# Altium PCB MCP73831_BMS.PcbDoc
Units mm, origin at the board's own origin, x right, y up, seen from the top; angles counter-clockwise.
Board outline 30 x 20 mm, 2 copper layers (Top Layer, Bottom Layer), stack 1.271 mm thick; 25 components, 11 nets, 77 pads, 10 vias.
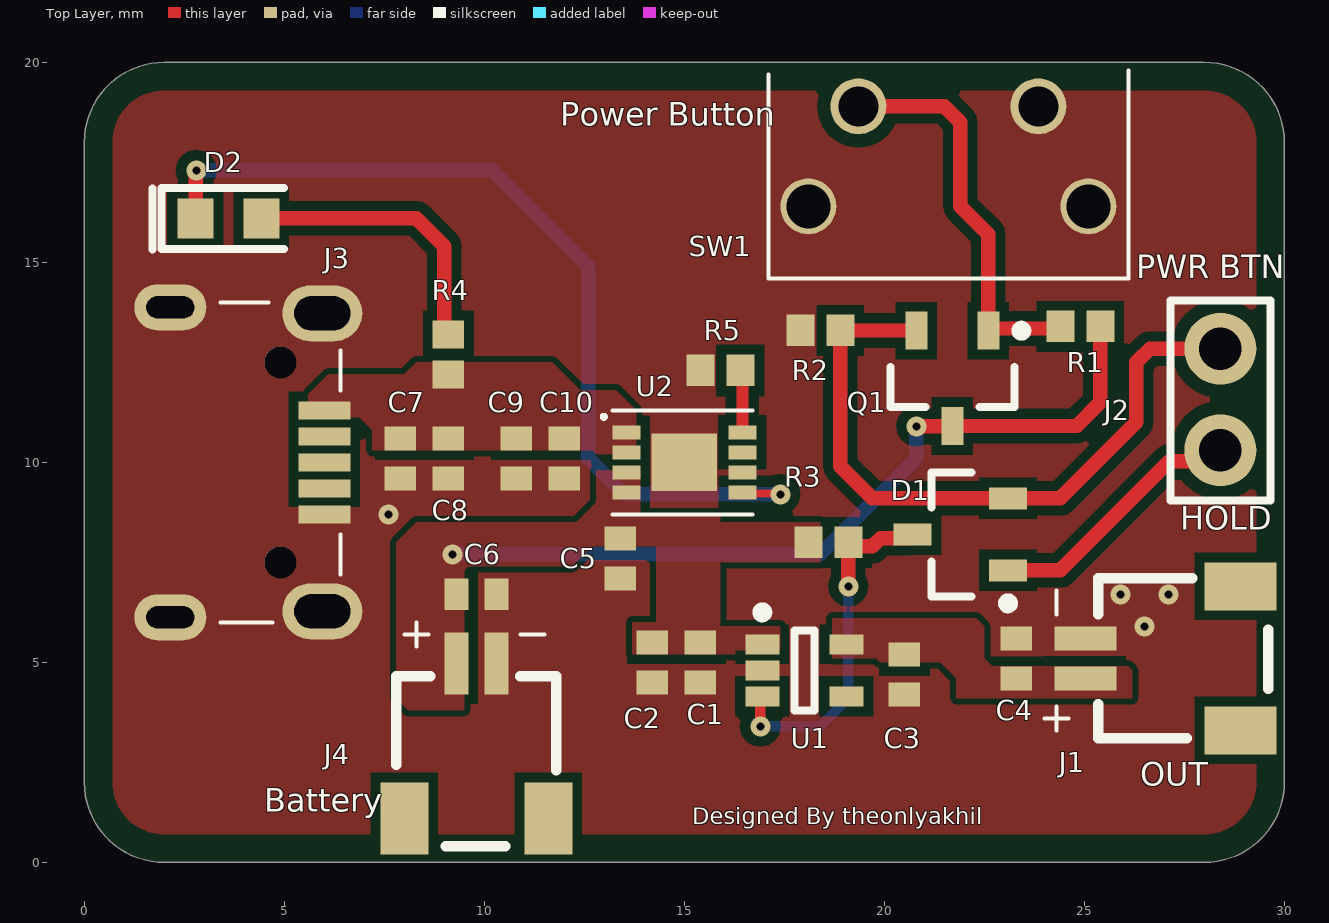
[diagram p0: Top Layer view]
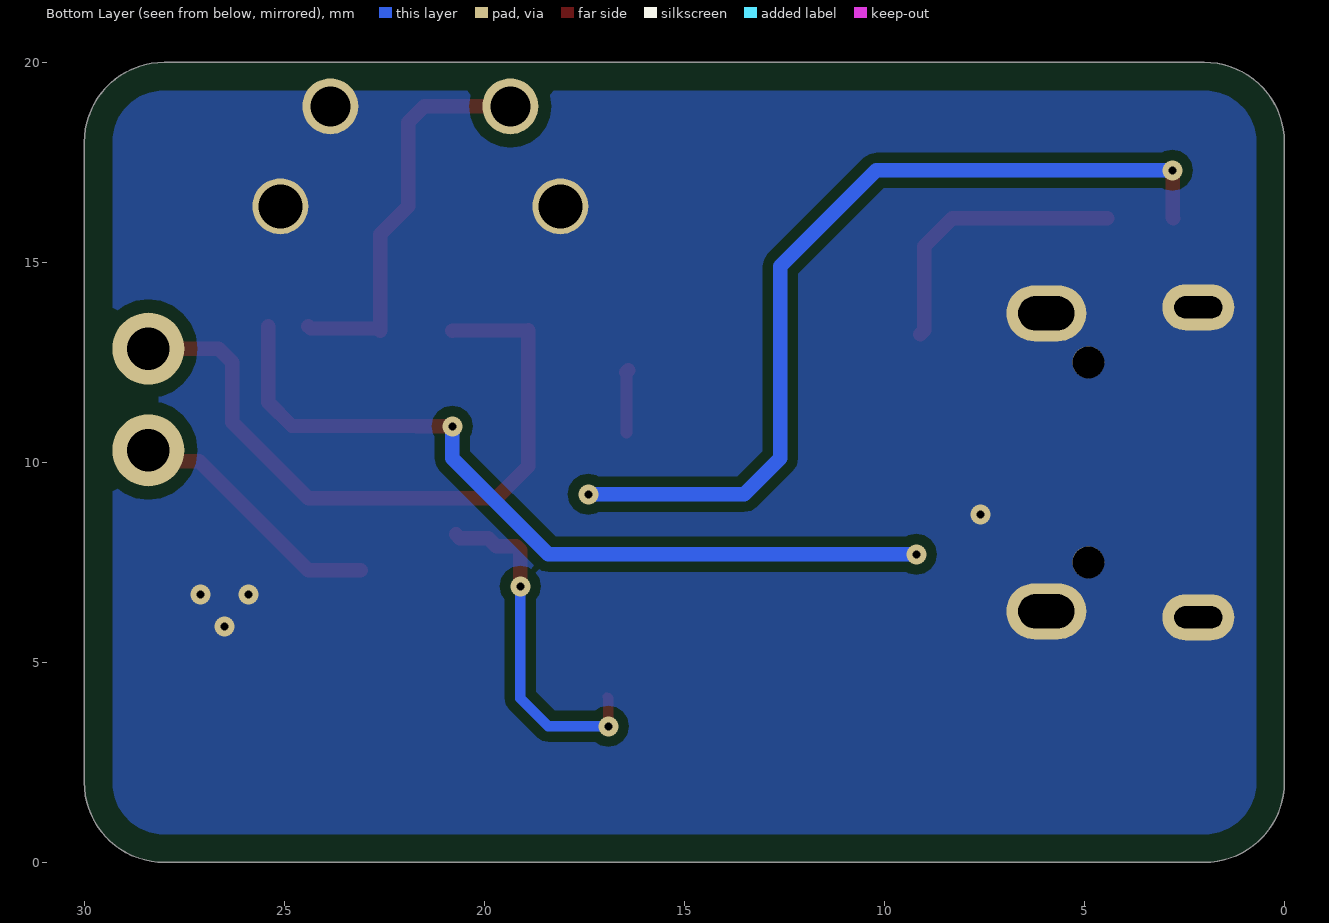
[diagram p1: Bottom Layer view, seen from below]
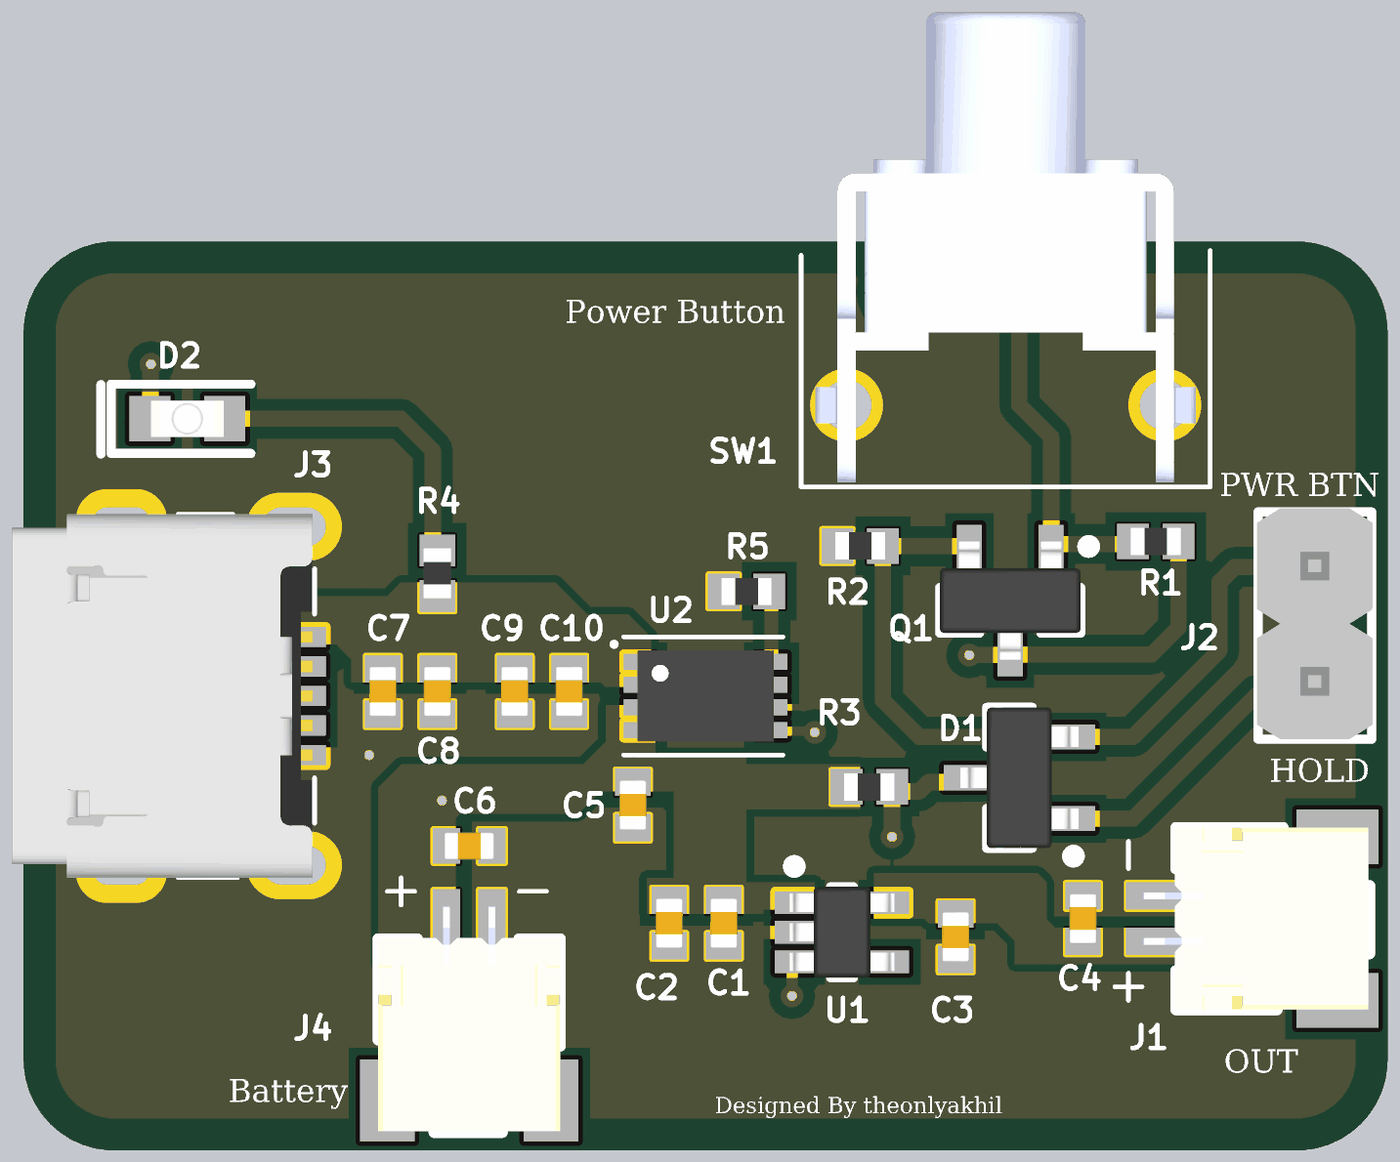
[diagram p2: 3D render of the assembled board from above, using the file's embedded part models]

## Layer stack, top to bottom
Top Solder: solder mask 0.0102, Solder Resist, Dk 3.5
Top Layer: signal copper 0.0356
Dielectric 1: dielectric 1.2, FR-4, Dk 4.8
Bottom Layer: signal copper 0.0356
Bottom Solder: solder mask 0.0102, Solder Resist, Dk 3.5

## Board outline
2,0 cw(c2,2) 0,2 0,18 cw(c2,18) 2,20 28,20 cw(c28,18) 30,18 30,2 cw(c28,2) 28,0

## Design rules (kind name [scope] priority, off if disabled: settings)
BoardOutlineClearance PAD_Clearance [InComponent('SW1')] p1: gap=0.1 ignorepadtopadclearanceinfootprint=FALSE
BoardOutlineClearance Mounting_Hole_Clearance_1 [InComponentClass('Mounting Hole')] p2: gap=0.2 ignorepadtopadclearanceinfootprint=FALSE
BoardOutlineClearance Top_Overlay_Clearance [OnLayer('Top Overlay')] p3: gap=0.2 ignorepadtopadclearanceinfootprint=FALSE
BoardOutlineClearance [All] p4: gap=0.7 ignorepadtopadclearanceinfootprint=FALSE except(0.2: SMDPad-OutlineEdge)
Clearance Fid_C [InComponentClass('FIDUCIALS') vs InPolygon] p1: gap=0.5 ignorepadtopadclearanceinfootprint=TRUE
Clearance Top_GND_Poly_Clearance [InNamedPolygon('TopGND')] p2: gap=0.3 ignorepadtopadclearanceinfootprint=FALSE
Clearance [All] p3: gap=0.254 ignorepadtopadclearanceinfootprint=TRUE except(0.102: Arc-Via Track-Via; 0.127: SMDPad-SMDPad; 0.15: Arc-Arc Arc-Track Arc-Text Track-Track Track-Text SMDPad-Text THPad-Text Via-Text Fill-Text Poly-Text Region-Text Text-Text Text-Hole; 0.152: Fill-Fill Fill-Poly Fill-Region Poly-Poly Poly-Region Region-Region; 0.16: Arc-SMDPad Track-SMDPad; 0.2: SMDPad-THPad; 0.279: Via-Via; 0.33: Arc-THPad Arc-Hole Track-THPad Track-Hole THPad-Fill THPad-Poly THPad-Region Fill-Hole Poly-Hole Region-Hole; 0.5: THPad-THPad THPad-Via THPad-Hole Via-Hole)
DiffPairsRouting ANAI_OUT [InDifferentialPair('GNSS_FE_ANAI')] p1: maxlimit=0.15 minlimit=0.15 mostfreqgap=0.15 toplayer_minwidth=0.194 toplayer_maxwidth=0.194 toplayer_prefwidth=0.194 bottomlayer_minwidth=0.194 bottomlayer_maxwidth=0.194 bottomlayer_prefwidth=0.194 maxuncoupledlength=12.7
HoleSize [All] p1: absolutevalues=TRUE maxlimit=6.3 minlimit=0.2 maxpercent=80.000 minpercent=20.000
HoleToHoleClearance Via_To_Via_Clearance [IsVia vs IsVia] p1: gap=0.254 allowstackedmicrovias=TRUE
HoleToHoleClearance [All] p2: gap=0.406 allowstackedmicrovias=TRUE
MatchedLengths "Mateched Lengths" [InNetClass('IQ_DATA')] p1: tolerance=1 checknetsindiffpair=FALSE checkdiffpairvsdiffpair=TRUE checkxsignals=TRUE checkothers=TRUE
MatchedLengths ANAI [InNetClass('ANAI_OUT')] p2: tolerance=0.5 checknetsindiffpair=FALSE checkdiffpairvsdiffpair=TRUE checkxsignals=TRUE checkothers=TRUE
MinimumAnnularRing [All] p1: minimumring=0.13
MinimumSolderMaskSliver MinimumSolderMaskSliver_foru2 [InComponent('U2')] p1: minsoldermaskwidth=0.05
MinimumSolderMaskSliver [All] p2: minsoldermaskwidth=0.2
PlaneClearance [All] p1: clearance=0.127
PlaneConnect [All] p1: planeconnectstyle=Direct reliefexpansion=0.508 reliefentries=4 reliefconductorwidth=0.254 reliefairgap=0.254
PolygonConnect [All] p1: connectstyle=Direct reliefconductorwidth=0.254 reliefentries=4 polygonreliefangle="90 Angle" airgapwidth=0.254
RoutingVias [All] p1: holewidth=0.2 width=0.5 viastyle="Through Hole" minholewidth=0.2 minwidth=0.5 maxholewidth=0.3 maxwidth=0.6
SilkToSilkClearance [All] p1: silktosilkclearance=0.15
SilkToSolderMaskClearance [IsPad] p1: minsilkscreentomaskgap=0.15 clearancetoexposedcopper=TRUE
SolderMaskExpansion [All] p1: expansion=0.102 istentingtop=FALSE
UnConnectedPin [not InComponentClass('FIDUCIALS') and InComponent('D3') and InComponent('D2')] p1:
UnRoutedNet [All] p1: checkbadconnections=TRUE
Width "IQ DATA" [InNetClass('IQ_DATA')] p1: maxlimit=0.146 minlimit=0.146 preferedwidth=0.146
Width "RF LINE" [InNetClass('RF LINE')] p2: maxlimit=0.146 minlimit=0.146 preferedwidth=0.146
Width [All] p3: maxlimit=5 minlimit=0.01 preferedwidth=0.254
21 further rules are at their usual default settings.

## Components (designator, comment, footprint, x,y, rotation, side; value= is the part's Value field where it differs from the comment)
C1 "10uF(10V)" CAPACITOR_0402 15.4,5 r90 top
C2 "2.2uF(25V)" CAPACITOR_0402 14.2,5 r90 top
C3 "10uF(10V)" CAPACITOR_0402 20.5,4.7 r90 top
C4 "2.2uF(25V)" CAPACITOR_0402 23.3,5.1 r270 top
C5 "4.7uF(16V)" CAPACITOR_0402 13.4,7.6 r90 top
C6 "4.7uF(16V)" CAPACITOR_0402 9.8,6.7 r180 top
C7 "0.1uF(25V )" CAPACITOR_0402 7.9,10.1 r90 top
C8 "0.1uF(25V )" CAPACITOR_0402 9.1,10.1 r90 top
C9 "4.7uF(16V)" CAPACITOR_0402 10.8,10.1 r90 top
C10 "4.7uF(16V)" CAPACITOR_0402 12,10.1 r90 top
D1 "BAV70LT1G" "SOT-23_3LEAD - BAV70" 21.9,8.2 r180 top
D2 "LED GREEN" 0603_LED 3.6,16.1 r180 top
J1 "BAT" SM02B-SRSS-TB(LF)(SN) 27,5.1 r90 top
J2 "PEC02SAAN" P2.541X2HDR 28.4,10.3 r90 top
J3 "MicroUSB" "Micro USB" 6,10 r270 top
J4 "BAT" SM02B-SRSS-TB(LF)(SN) 9.8,3 r0 top
Q1 "FDV304P" SOT-23_3LEAD 21.7,12.1 r270 top
R1 "100K" RESISTOR_0402 24.9,13.4 r0 top
R2 "100K" RESISTOR_0402 18.4,13.3 r0 top
R3 "100K" RESISTOR_0402 18.6,8 r180 top
R4 "330R" RESISTOR_0402 9.1,12.7 r270 top
R5 "3.3K(1%)" RESISTOR_0402 15.9,12.3 r0 top
SW1 "Switch" "right angle through hole switch" 21.6,18.9 r180 top
U1 "3.3V" SOT23-5LEAD 18,4.8 r0 top
U2 "MCP73831" 8VFDFN 15,10 r0 top

## Footprints (in the part's own frame and the unit in brackets; to place one, negate y for a bottom-side part, rotate by r counter-clockwise, add the part's x,y. Pads: shape width x height; smd on the part's side, far side on the other; paste and mask are expansions set on the pad)
8VFDFN [mm] "PSON, 8-Leads, Body 2.00x3.00mm, Pitch 0.50mm, Thermal Pad 1.43x1.63mm, IPC Medium Density"
  rect 0.7x0.35 smd: 1(-1.45,0.75) 2(-1.45,0.25) 3(-1.45,-0.25) 4(-1.45,-0.75) 5(1.45,-0.75) 6(1.45,-0.25) 7(1.45,0.25) 8(1.45,0.75)
  rect 1.63x1.43 smd: 9(0,0)
  silkscreen extent -2.06,-1.3 1.7,1.3, body extent -1.5,-1 1.5,1, height 0.9
0603_LED [mm] "SMD 0603 LED"
  rect 0.9x1 smd: 1(-0.825,0) 2(0.825,0)
  silkscreen extent -1.4,-0.76 1.9,0.77, body extent -0.8,-0.4 0.8,0.4, height 0.96
CAPACITOR_0402 [mm] "0402 Capacitor"
  rect 0.6x0.78 smd mask+0.05: 1(-0.5,0) 2(0.5,0)
  body extent -0.55,-0.3 0.55,0.3, height 0.5
"Micro USB" [mm]
  rect 0.45x1.3 smd: 1(-1.3,0) 2(-0.65,0) 3(0,0) 4(0.65,0) 5(1.3,0)
  oval 1.4x2 hole 0.85 slot 1.4 at 90 deg mask+0.05: 6(3.725,-0.05) 7(-3.725,-0.05)
  oval 1.15x1.8 hole 0.55 slot 1.2 at 90 deg: 8(-3.875,-3.85) 9(3.875,-3.85)
  round 0.8 hole 0.8 mask+0.05: 10(-2.5,-1.1) 11(2.5,-1.1)
  silkscreen extent -4,-2.6 4,0.4, body extent -4,-6.25 4,0.35, height 2.77
P2.541X2HDR [mm]
  round 1.8 hole 1.06: 1(0,0) 2(2.54,0)
  silkscreen extent -1.25,-1.25 3.75,1.25, body extent -1.25,-1.27 3.83,1.27, height 8.84
RESISTOR_0402 [mm] "0402 Resistor Package Footprint"
  rect 0.7x0.78 smd mask+0.05: 1(-0.5,0) 2(0.5,0)
  body extent -0.55,-0.3 0.55,0.3, height 0.3
"right angle through hole switch" [mm]
  round 1.4 hole 1.1: 1(-3.5,2.5) 4(3.5,2.5)
  round 1.4 hole 1: 2(-2.25,0) 3(2.25,0)
  silkscreen extent -4.5,-0.9 4.4,4.3, body extent -4.19,-6.15 4.19,4.2, height 9.1
SM02B-SRSS-TB(LF)(SN) [mm]
  rect 0.6x1.55 smd mask+0.05: 1(-0.5,1.975) 2(0.5,1.975)
  rect 1.2x1.8 smd: 3(-1.8,-1.9) 4(1.8,-1.9)
  silkscreen extent -2,-2.6 2,3, body extent -2,-2.58 2,2.37, height 2.96
SOT23-5LEAD [mm]
  rect 0.85x0.5 smd: 1(-1.05,0.65) 2(-1.05,0) 3(-1.05,-0.65) 4(1.05,-0.65) 5(1.05,0.65)
  silkscreen extent -1.17,-1 0.25,1.57, body extent -1.15,-1 1.15,1, height 1.15
SOT-23_3LEAD [mm]
  rect 0.95x0.55 smd: D(1.19,0) G(-1.19,0.9) S(-1.19,-0.9)
  silkscreen extent -1.31,-1.55 0.71,1.85, body extent -1.3,-1.55 1.3,1.55, height 1.15
"SOT-23_3LEAD - BAV70" [mm]
  rect 0.95x0.55 smd: 1(-1.19,0.9) 2(-1.19,-0.9) 3(1.19,0)
  silkscreen extent -1.32,-1.55 0.71,1.85, body extent -1.3,-1.55 1.3,1.55, height 1.15

## Part data
C1 C3: library part CL05A106MP8NUB8, "10µF ±20% 10V Ceramic Capacitor X5R 0402 (1005 Metric)", Manufacturer="Samsung Electro-Mechanics", MaxTemp=85°C, MinTemp=-55°C, SupplierPartNumber=1276-6830-1-ND, ComponentLink1Description=SupplierURL, ComponentLink1URL=https://www.digikey.com/en/products/detail/samsung-electro-mechanics/CL05A106MP8NUB8/5961314, ManufacturerPartNumber=CL05A106MP8NUB8, PartStatus=Active, Price=0.36, Supplier=Digikey
C2 C4: library part GRT155R61E225KE13D, "2.2 µF ±10% 25V Ceramic Capacitor X5R 0402 (1005 Metric)", Manufacturer="Murata Electronics", MaxTemp=85°C, MinTemp=-55°C, SupplierPartNumber=490-12267-1-ND, ComponentLink1Description=SupplierURL, ComponentLink1URL=https://www.digikey.com/en/products/detail/murata-electronics/GRT155R61E225KE13D/5416689, ManuafcturerPartNumber=GRT155R61E225KE13D, PartSatus=Active, Price=0.29, Supplier=Digikey
C5 C6 C9 C10: library part 0402YD475MAT2A, "4.7µF ±20% 16V Ceramic Capacitor X5R 0402 (1005 Metric)", Manufacturer="AVX Corporation", MaxTemp=85°C, MinTemp=-55°C, SupplierPartNumber=478-10788-1-ND, ComponentLink1Description=SupplierURL, ComponentLink1URL=https://www.digikey.com/en/products/detail/avx-corporation/0402YD475MAT2A/6221357, ManufacturerPartNumber=0402YD475MAT2A, PartStatus=Active, Price=0.29, Supplier=Digikey
C7 C8: library part GRM155R71E104KE14J, "0.1µF ±10% 25V Ceramic Capacitor X7R 0402 (1005 Metric)", Manufacturer="Murata Electronics", MaxTemp=125°C, MinTemp=-55°C, SupplierPartNumber=490-14603-1-ND, ComponentLink1Description=SupplierURL, ComponentLink1URL=https://www.digikey.com/en/products/detail/murata-electronics/GRM155R71E104KE14J/4905174, ManufacturerPartNumber=GRM155R71E104KE14J, PartStatus=Active, Price=0.10, Supplier=Digikey
D1: "Diode Array 1 Pair Common Cathode Standard 200mA (DC) Surface Mount TO-236-3, SC-59, SOT-23-3", Manufacturer="ON Semiconductor", MaxTemp=150°C, MinTemp=-55°C, SupplierPartNumber=BAV70LT1GOSCT-ND, ComponentLink1Description=SupplierURL, ComponentLink1URL=https://www.digikey.com/en/products/detail/on-semiconductor/BAV70LT1G/918324, ManufacturerPartNumber=BAV70LT1G, PartStatus=Active, Price=0.14, Supplier=Digikey
D2: library part XZVG53W-8, "Green 570nm LED Indication - Discrete 2.1V 0603 (1608 Metric)", Max Temp=+85°C, Min Temp=-40°C, Supplier Part Number=1497-1215-1-ND, ComponentLink1Description="Supplier Link", ComponentLink1URL=https://www.digikey.com/en/products/detail/sunled/XZVG53W-8/4745971, Manufacturer Part Number=XZVG53W-8, Part Status=Active, Price=0.36
J1 J4: library part SM02B-SRSS-TB(LF)(SN), "Connector Header Surface Mount, Right Angle 2 position 0.039\" (1.00mm)", Manufacturer="JST Sales America Inc.", MaxTemp=85°C, MinTemp=-25°C, SupplierPartNumber=455-1802-1-ND, ComponentLink1Description=SupplierURL, ComponentLink1URL=https://www.digikey.com/en/products/detail/jst-sales-america-inc/SM02B-SRSS-TB-LF-SN/926708, ManufacturerPartNumber=SM02B-SRSS-TB(LF)(SN), PartStatus=Active, Price=0.47, Supplier=Digikey
J2: "Connector Header Through Hole 2 position 0.100\" (2.54mm)", Max Temp=125°C, Min Temp=-65°C, Supplier Part Number=S1012E-02-ND, ComponentLink1Description="Supplier Link", ComponentLink1URL=https://www.digikey.com/en/products/detail/sullins-connector-solutions/PEC02SAAN/859155, Manyfacturer Part Number=PEC02SAAN, Part Status=Active, Price=0.18
J3: library part 629105150521, "USB - micro B USB 2.0 Receptacle Connector 5 Position Surface Mount, Right Angle; Through Hole", Manufacturer="Würth Elektronik", MaxTemp=85°C, MinTemp=-40°C, SupplierPartNumber=732-5960-1-ND, ComponentLink1Description=SupplierURL, ComponentLink1URL=https://www.digikey.com/en/products/detail/würth-elektronik/629105150521/5047751, ManufacturerPartNumber=629105150521, PartStatus=Active, Price=2.07, Supplier=Digikey
Q1: "P-Channel 460mA (Ta) 350mW (Ta) Surface Mount SOT-23", Manufacturer="ON Semiconductor", MaxTemp=150°C, MinTemp=-55°C, SupplierPartNumber=FDV304PCT-ND, ComponentLink1Description=SupplierURL, ComponentLink1URL=c, ComponentLink2Description=MouserURL, ComponentLink2URL=https://www.mouser.in/ProductDetail/Microchip-Technology/MCP1812BT-033-OT?qs=byeeYqUIh0NTmNeIvl%2Fnbw%3D%3D, ManufacturerPartNumber=FDV304P, PartStatus=Active, Price=0.34, Supplier=Digikey
R1 R2 R3: library part ERJ-2GEJ104X, "100 kOhms ±5% 0.1W, 1/10W Chip Resistor 0402 (1005 Metric) Automotive AEC-Q200 Thick Film", Manufacturer="Panasonic Electronic Components", MaxTemp=155°C, MinTemp=-55°C, SupplierPartNumber=P100KJCT-ND, ComponentLink1Description=SupplierURL, ComponentLink1URL=https://www.digikey.com/en/products/detail/panasonic-electronic-components/ERJ-2GEJ104X/146731, ManufacturerPartNumber=ERJ-2GEJ104X, PartStatus=Active, Price=0.10, Supplier=Digikey
R4: library part CRGCQ0603J330R, "±5% 0.1W, 1/10W Chip Resistor 0603 (1608 Metric) Automotive AEC-Q200, Moisture Resistant Thick Film", Manufacturer="TE Connectivity Passive Product", MaxTemp=155°C, MinTemp=-55°C, SupplierPartNumber=A130088CT-ND, ComponentLink1Description=SupplierURL, ComponentLink1URL=https://www.digikey.com/en/products/detail/te-connectivity-passive-product/CRGCQ0603J330R/8576690, ManufacturerPartNumber=CRGCQ0603J330R, PartStatus=Active, Price=0.10, Supplier=Digikey
R5: library part RK73H1ETTP3301F, "3.3 ±1% 0.1W, 1/10W Chip Resistor 0402 (1005 Metric) Automotive AEC-Q200, Moisture Resistant Thick Film", Manufacturer="KOA Speer Electronics, Inc.", MaxTemp=155°C, MinTemp=-55°C, SupplierPartNumber=2019-RK73H1ETTP3301FCT-ND, ComponentLink1Description=SupplierURL, ComponentLink1URL=https://www.digikey.com/en/products/detail/koa-speer-electronics-inc/RK73H1ETTP3301F/9844094, ManufacturerPartNumber=RK73H1ETTP3301F, PartStatus=Active, Price=0.10, Supplier=Digikey
SW1: library part 1301.9502, "Tactile Switch SPST-NO Side Actuated Through Hole, Right Angle", Manufacturer="Schurter Inc.", MaxTemp=70°C, MinTemp=-20°C, SupplierPartNumber=486-3472-ND, ComponentLink1Description=SupplierURL, ComponentLink1URL=https://www.digikey.com/en/products/detail/schurter-inc/1301-9502/7602720, ComponentLink2Description=rydoLabs, ComponentLink2URL=https://www.rhydolabz.com/hardwares-switches-c-170_171/right-angle-tactile-push-button-switch-5mm-shaft-dip-p-2817.html, ManufacturerPartNumber=1301.9502, PartStatus=Active, Price=0.30, Supplier=Digikey
U1: library part MCP1812BT-033/OT, "LDO Voltage Regulators Ultra Low Iq LDO", Manufacturer="Microchip Technology", MaxTemp="+ 85 C", MinTemp="- 40 C", SupplierPartNumber=579-MCP1812BT-033/OT, ComponentLink1Description=SupplierURL, ComponentLink1URL=https://www.mouser.in/ProductDetail/Microchip-Technology/MCP1812BT-033-OT?qs=byeeYqUIh0NTmNeIvl%2Fnbw%3D%3D, ManuafcturerPartNumber=MCP1812BT-033/OT, PartStatus=Active, Price=29.11(INR), Supplier=Mouser
U2: library part MCP73831T-2DCI/MC, "Charger IC Lithium Ion/Polymer 8-DFN (2x3)", Manufacturer="Microchip Technology", MaxTemp=85°C, MinTemp=-40°C, SupplierPartNumber=MCP73831T-2DCI/MCCT-ND, ComponentLink1Description=SupplierURL, ComponentLink1URL=https://www.digikey.in/en/products/detail/microchip-technology/MCP73831T-2DCI-MC/964304, ManufacturerPartNumber=MCP73831T-2DCI/MC, PartStatus=Active, Price=0.62, Supplier=Digikey

## Via types
v1: diameter 0.5, hole 0.2, Top Layer to Bottom Layer, tented both sides, 10 vias

## Nets (pads, with @x,y where several pads share a name; then routed paths per layer and width w, separated by ;. In a path a pad name is that pad's centre, name@x,y a point inside that pad or via, vN(x,y) a via of type N, cw(c..) or ccw(c..) an arc to the next point about the centre after c; other vN are vias at no path point)
+3V3: C3.2 C4.2 J1.1 U1.5
GND: C1.1 C2.1 C3.1 C4.1 C5.1 C6.1 C7.1 C8.1 C9.1 C10.1 J1.2 J3.5 J3.6 J3.7 J3.8 J3.9 J3.10 J3.11 J4.2 R2.1 R5.1 SW1.1 SW1.2 SW1.4 U1.2 U2.6 U2.9
  other v1: 26.5,5.9 25.9,6.7 27.1,6.7 7.6,8.7
NetD2_1: D2.1 R4.1 | length 7.1
  Top Layer w0.358: D2.1 8.3,16.1 9,15.4 9,13.3 R4.1
NetD2_2: D2.2 U2.5 | length 22.9
  Top Layer w0.2: U2.5 16.475,9.225 17.375,9.225 v1(17.4,9.2)
  Top Layer w0.358: D2.2 2.788,16.113 2.788,17.288 v1(2.8,17.3)
  Bottom Layer w0.358: v1(2.8,17.3) 10.2,17.3 12.6,14.9 12.6,10.1 13.5,9.2 v1(17.4,9.2)
NetQ1_G: Q1.G R1.1 SW1.3 | length 10.1
  Top Layer w0.358: SW1.3 21.5,18.9 21.9,18.5 21.9,16.4 22.6,15.7 Q1.G 22.655,13.345 24.345,13.345 R1.1
NetR5_2: R5.2 U2.8 | length 1.6
  Top Layer w0.3: U2.8 R5.2@16.45,12.25
  Top Layer w0.358: R5.2 R5.2@16.45,12.25
POWER_BUTTON: D1.2 J2.2 Q1.S R2.2 | length 17.6
  Top Layer w0.358: Q1.S 20.795,13.295 18.905,13.295 R2.2 18.9,9.9 19.7,9.1 D1.2 24.4,9.1 26.3,11 26.3,12.5 26.64,12.84 J2.2
PWR_HOLD: D1.1 J2.1 | length 6.6
  Top Layer w0.358: D1.1 24.4,7.3 27.124,10.024 28.124,10.024 J2.1
REG_ENB: D1.3 R3.1 U1.3 | length 8.7
  Top Layer w0.2: U1.3@16.9,4.1 U1.3
  Top Layer w0.254: v1(16.9,3.4) U1.3@16.9,4.1
  Top Layer w0.358: v1(19.1,6.9) 19.1,7.8 19.2,7.9 19.7,7.9 19.904,8.104 20.614,8.104 D1.3
  Bottom Layer w0.254: v1(16.9,3.4) 18.4,3.4 19.1,4.1 v1(19.1,6.9)
VBAT: C1.2 C2.2 C5.2 C6.2 J4.1 Q1.D R1.2 R3.2 U1.1 U2.3 U2.4 | length 20.1
  Top Layer w0.358: v1(20.8,10.9) 20.805,10.905 21.695,10.905 Q1.D 24.81,10.91 25.4,11.5 R1.2
  Bottom Layer w0.358: v1(9.2,7.7) 18.4,7.7 20.8,10.1 v1(20.8,10.9)
VBUS: C7.2 C8.2 C9.2 C10.2 J3.1 R4.2 U2.1 U2.2
pads on no net: J1.3 J1.4 J3.2 J3.3 J3.4 J4.3 J4.4 U1.4 U2.7

## Polygon pours and split planes (outlines as drawn)
VBUS on Top Layer "VBUS_L01_P000" (solid, pour order 0): 6.1,12.2 5.6,11.7 5.6,11.1 6.9,11.1 7.2,10.8 7.2,10.3 12.7,10.3 12.8,10.2 13.8,10.2 13.8,11.3 13.3,11.8 12.4,11.8 11.7,12.5 8.3,12.5 8,12.2 7.4,12.2
GND on Top Layer "GND_L01_P003" (solid, pour order 3): 2,0 cw(c2,2) 0,2 0,18 cw(c2,18) 2,20 28,20 cw(c28,18) 30,18 30,2 cw(c28,2) 28,0
+3V3 on Top Layer "+3V3_L01_P002" (solid, pour order 2): 18.7,6.1 18.7,5.1 19.8,5.1 19.9,5 21.4,5 21.8,4.6 21.8,4.1 26.2,4.1 26.2,4.8 26.1,4.9 22.7,4.9 22.5,5.1 22.5,5.9 22.3,6.1
VBAT on Top Layer "VBAT_L01_P001" (solid, pour order 1): 9.6,7.4 9.5,7.3 9.5,3.8 8.1,3.8 7.8,4.1 7.8,8 8.3,8.5 12.3,8.5 12.8,9 12.8,9.8 13.9,9.8 13.9,8.7 15.9,8.7 15.9,8.5 18.4,8.5 18.4,7.5 15.9,7.5 15.9,5.9 17.4,5.9 17.4,5.2 13.7,5.2 13.7,6 14.3,6 14.3,7.9 12.7,7.9 12.2,7.4
GND on Bottom Layer "GND_L02_P005" (solid, pour order 5): 2,0 cw(c2,2) 0,2 0,18 cw(c2,18) 2,20 28,20 cw(c28,18) 30,18 30,2 cw(c28,2) 28,0

## Silkscreen, mask and mechanical layers (free items; w line width, h text height)
Top Overlay:
  lines w0.1: 17.1,19.7 17.1,14.6 ; 17.2,14.6 17.1,14.6 ; 17.1,14.6 17.1,14.6
  text "Power Button" at 11.9,18.213 h1
  text "PWR BTN" at 26.3,14.4 h1
  text "HOLD" at 27.4,8.113 h1
  text "OUT" at 26.4,1.713 h1
  text "Battery" at 4.5,1.066 h1
  text "Designed By theonlyakhil" at 15.2,0.82 h0.7